# Altium PCB balan_31.PcbDoc (part 1 of 2)
Units mm, origin at the board's own origin, x right, y up, seen from the top; angles counter-clockwise.
Board outline 80 x 100 mm, 2 copper layers (Top Layer, Bottom Layer), stack 1.57 mm thick; 167 components, 120 nets, 563 pads, 148 vias.
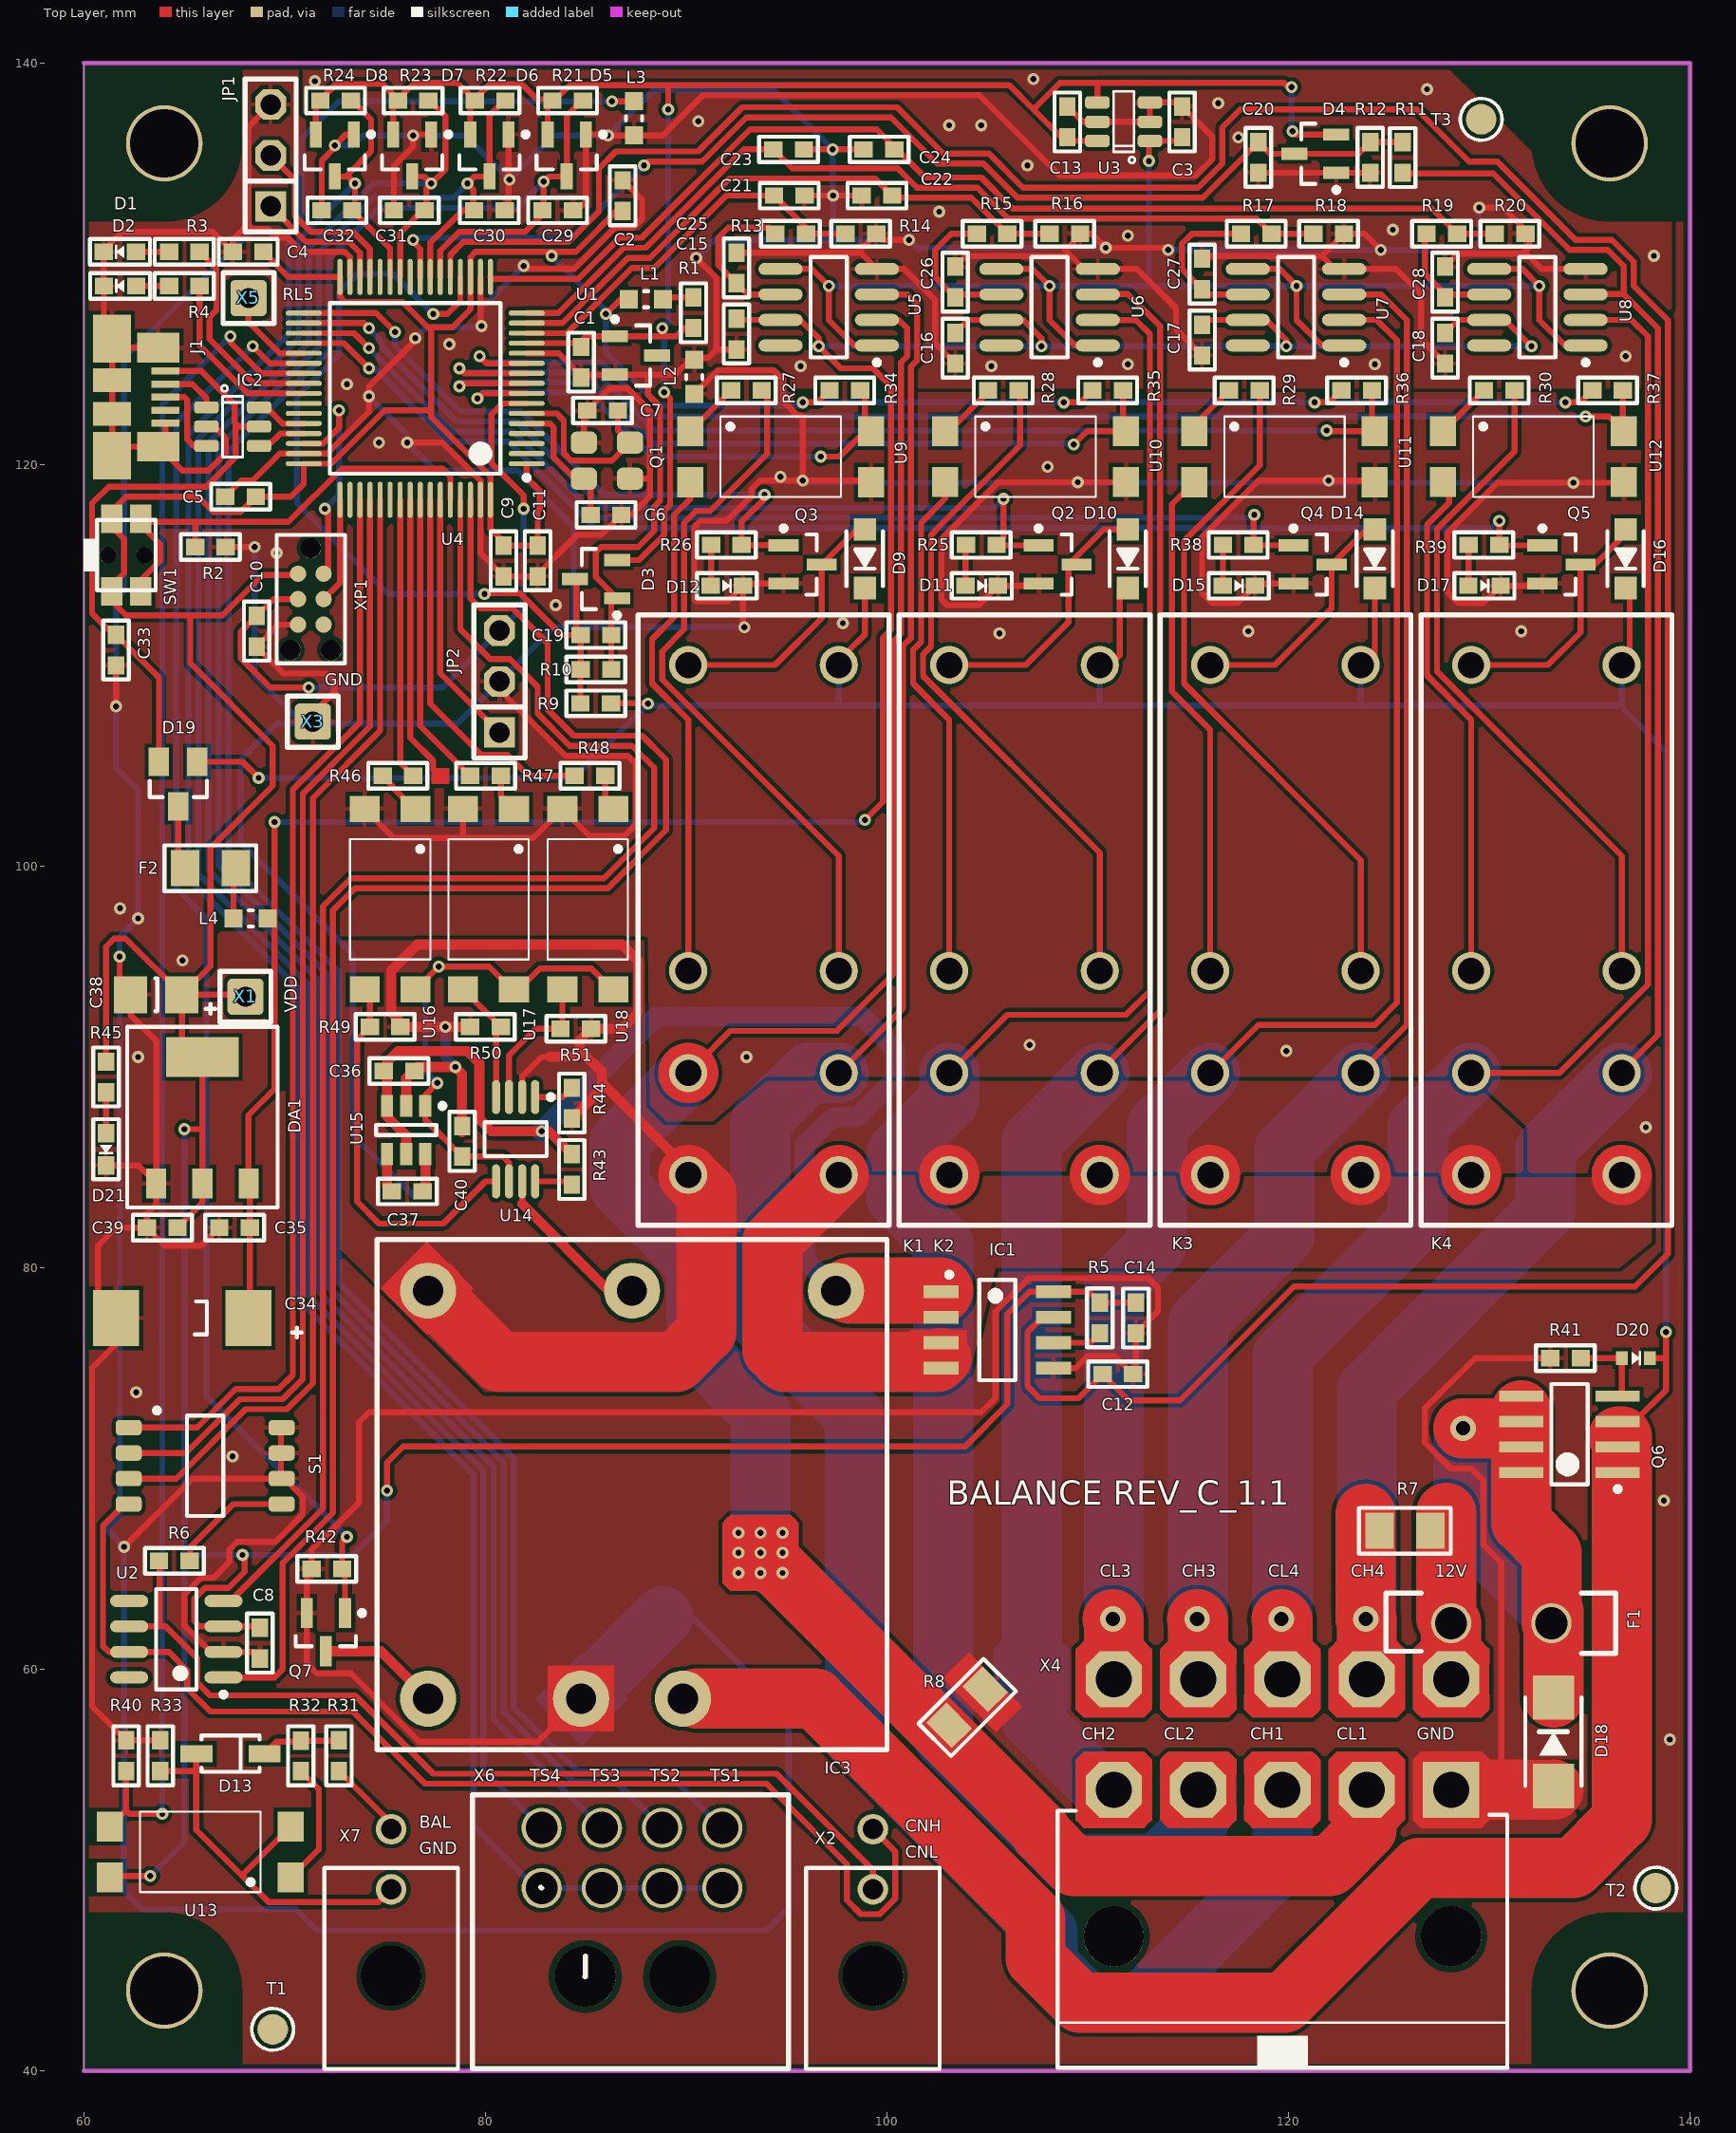
[diagram p0: Top Layer view]
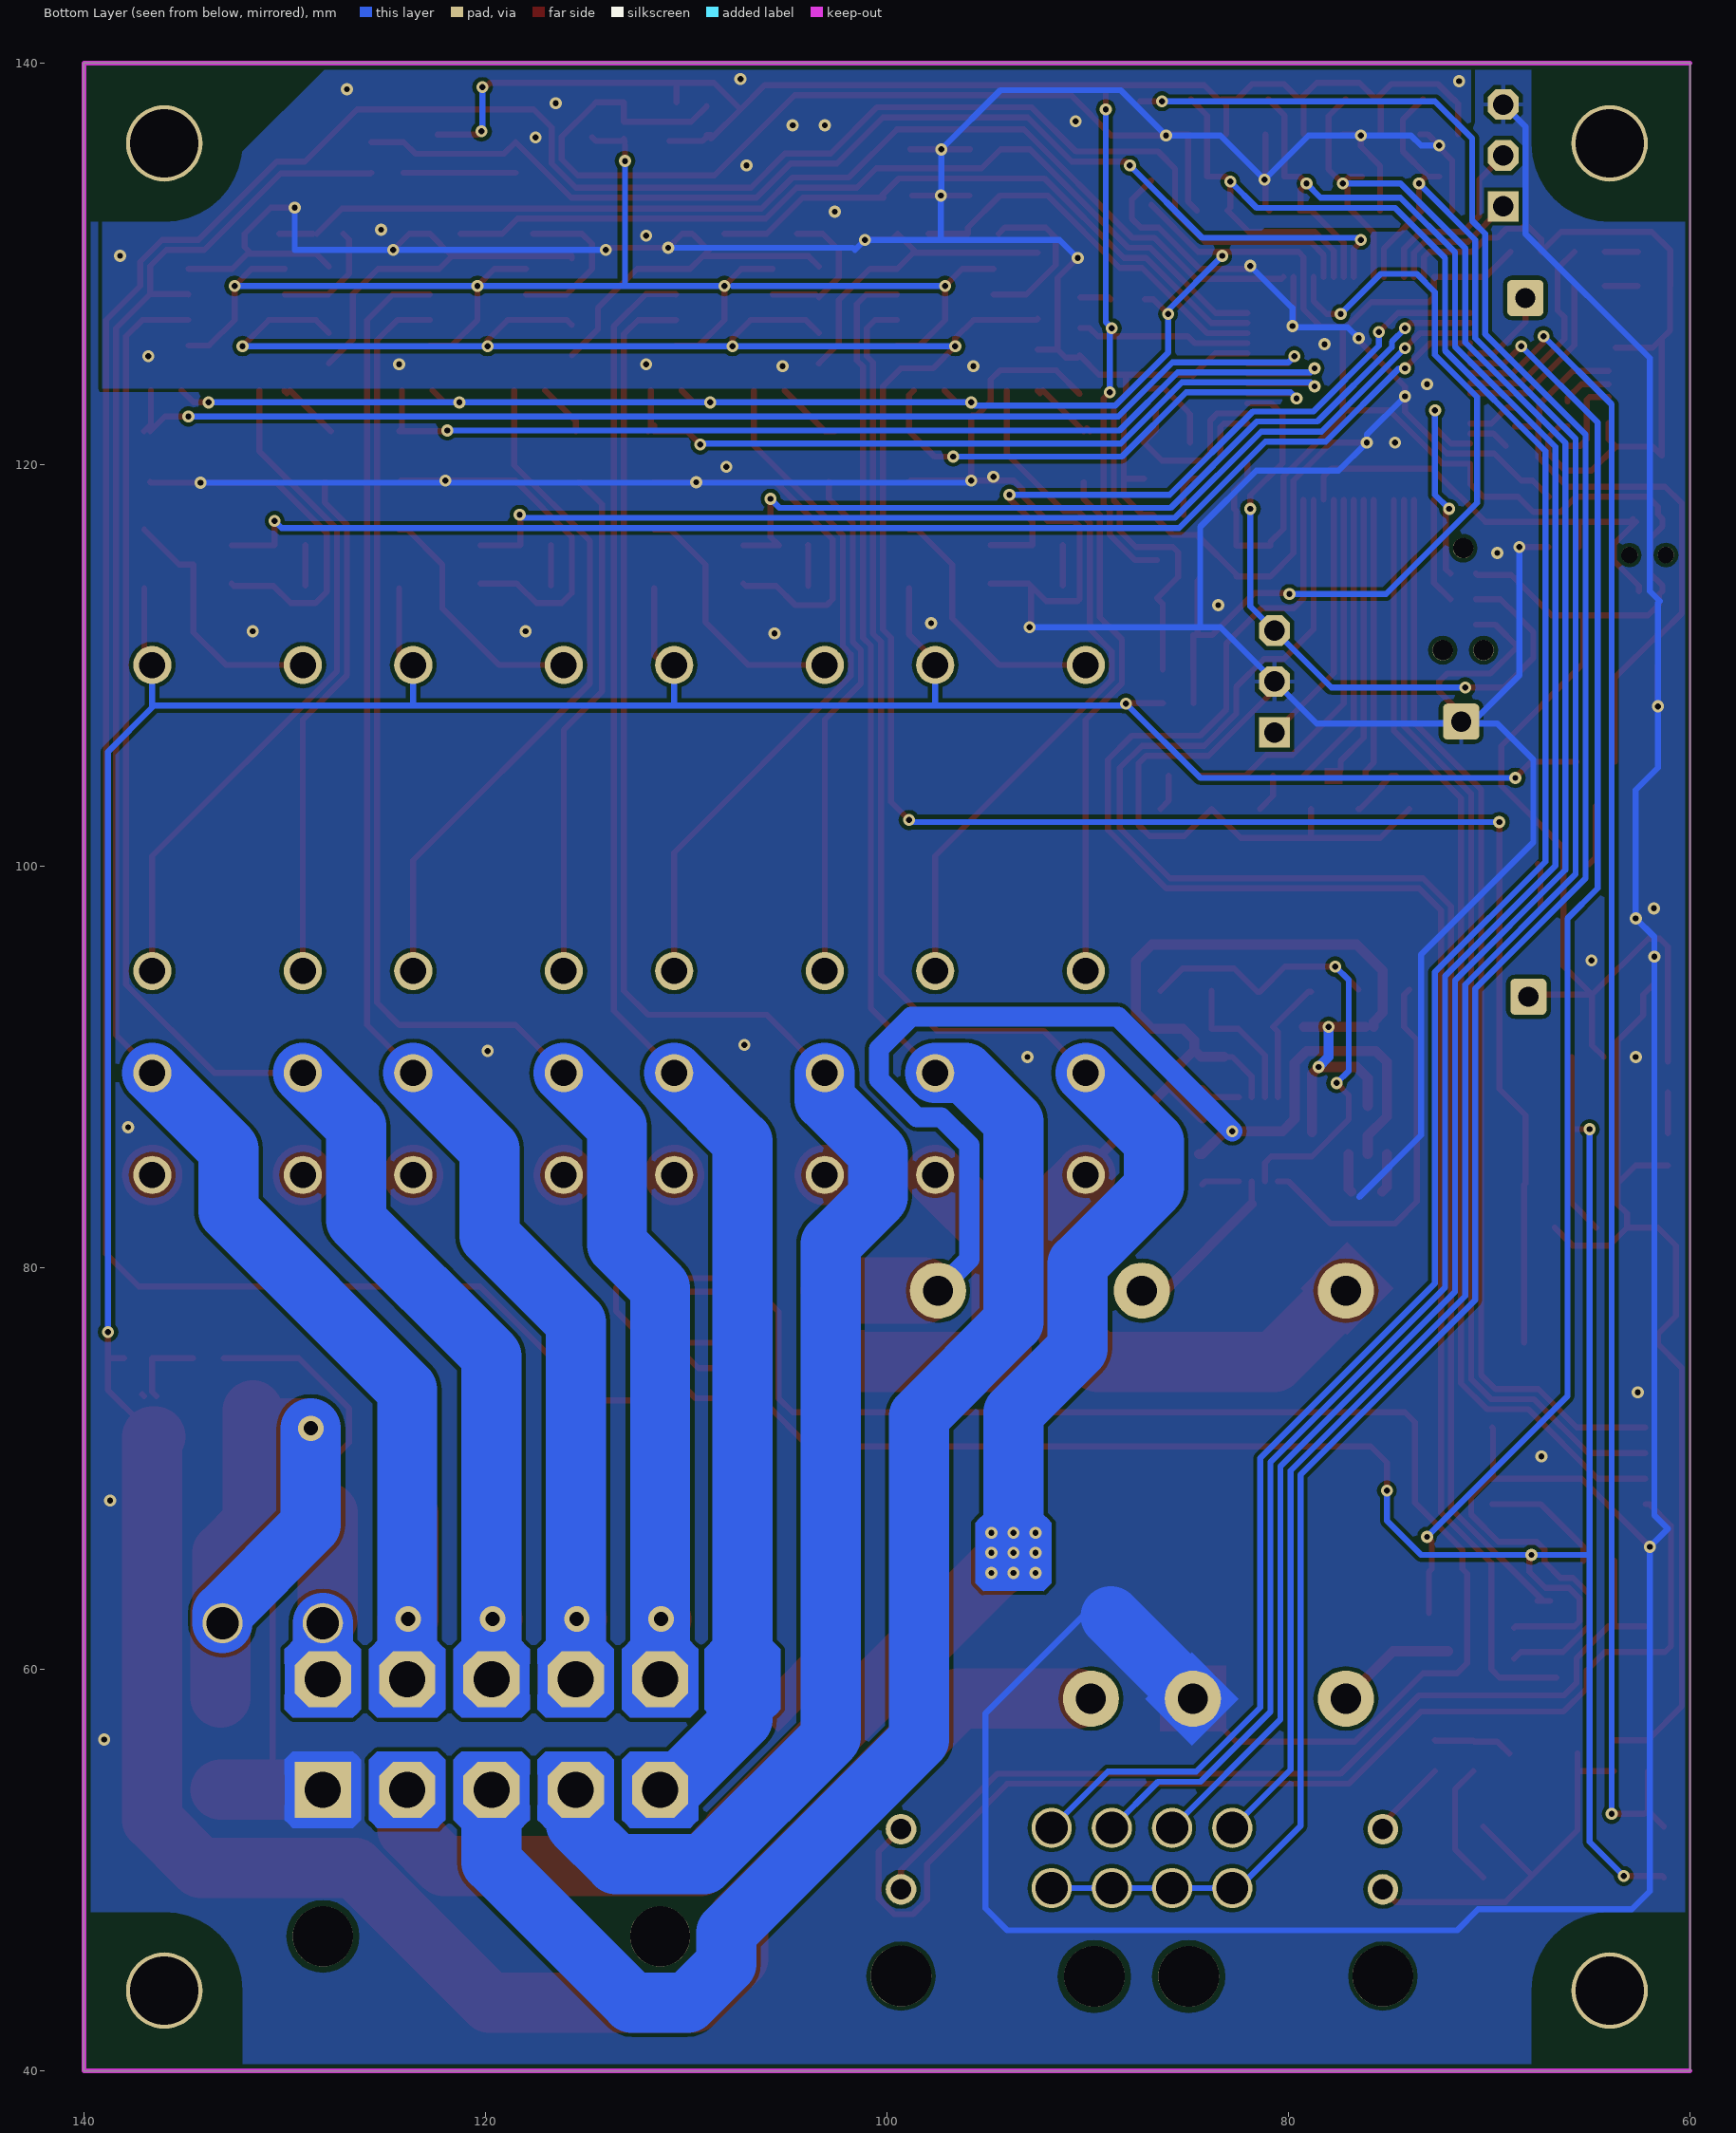
[diagram p1: Bottom Layer view, seen from below]

## Layer stack, top to bottom
Top Solder: solder mask 0.0102, Solder Resist, Dk 3.5
Top Layer: signal copper 0.035
Dielectric 1: dielectric 1.5, FR-4, Dk 4.8
Bottom Layer: signal copper 0.035
Bottom Solder: solder mask 0.0102, Solder Resist, Dk 3.5

## Board outline
60,40 140,40 140,140 60,140

## Design rules (kind name [scope] priority, off if disabled: settings)
Clearance "All to mounting hole" [IsPad and not PadIsPlated and Onlayer('Multi-Layer') And (HoleDiameter > 3.2)] p1: gap=2
Clearance "All to mounting hole_1" [IsPad and not PadIsPlated and Onlayer('Multi-Layer') And (HoleDiameter < 3.2)] p2: gap=0.3
Clearance Clearance_5 [All] p3: gap=0.2
Clearance Clearance_4 [(ObjectKind = 'Pad') And (Layer = 'MultiLayer') And (PadIsPlated = 'False')] p4: gap=0.3
Clearance Clearance_2 [(ObjectKind = 'Track') And (Layer = 'Top Layer') And (Net = 'USB_DP') vs InNamedPolygon('GND')] p5: gap=0.6
Clearance Clearance_3 [(ObjectKind = 'Track') And (Layer = 'Top Layer') And (Net = 'USB_DM') vs InNamedPolygon('GND')] p6: gap=0.6
Clearance Clearance_1 [(ObjectKind = 'Track') And (Layer = 'KeepOutLayer')] p7: gap=0.4
Clearance [All] p8: gap=0.2
ComponentClearance [All] p1: gap=0 collisioncheckmode=3 verticalgap=0 showdistances=FALSE
Height [All] p1: minheight=0 maxheight=40 prefheight=12.7
HoleSize [All] p1: absolutevalues=TRUE maxlimit=10 minlimit=0.3 maxpercent=80.000 minpercent=20.000
HoleToHoleClearance [All] p1: gap=0 allowstackedmicrovias=TRUE
MinimumSolderMaskSliver [All] p1: minsoldermaskwidth=0.15
PolygonConnect PolygonConnect_VIA [IsVia] p1: connectstyle=Direct reliefconductorwidth=0.254 reliefentries=4 polygonreliefangle="90 Angle" airgapwidth=0.254
PolygonConnect [All] p2: connectstyle=Relief reliefconductorwidth=0.22 reliefentries=4 polygonreliefangle="90 Angle" airgapwidth=0.2
RoutingVias [All] p1: holewidth=0.3 width=0.6 viastyle="Through Hole" minholewidth=0.3 minwidth=0.6 maxholewidth=10 maxwidth=20
SilkToSilkClearance [All] p1: silktosilkclearance=0
SilkToSolderMaskClearance [IsPad] p1: minsilkscreentomaskgap=0 clearancetoexposedcopper=TRUE
SolderMaskExpansion [All] p1: expansion=0.05
Width [All] p1: maxlimit=10 minlimit=0.125 preferedwidth=0.3
Width PWR [InNetClass('PWR')] p2: maxlimit=5 minlimit=0.3 preferedwidth=3
23 further rules are at their usual default settings.

## Classes and differential pairs
component class Rev_C_Mcu: C1 C2 C3 C4 C5 C6 C7 C8 C9 C10 C11 C12 C13 C14 C15 C16 C17 C18 C19 C20 C21 C22 C23 C24 C25 C26 C27 C28 C29 C30 C31 C32 D1 D2 D3 D4 D5 D6 D7 D8 D9 D10 D11 D12 D13 D14 D15 D16 D17 IC1 IC2 J1 JP1 JP2 JP? K1 K2 K3 K4 L1 L2 L3 Q1 Q2 Q3 Q4 Q5 R1 R2 R3 R4 R5 R6 R7 R8 R9 R10 R11 R12 R13 R14 R15 R16 R17 R18 R19 R20 R21 R22 R23 R24 R25 R26 R27 R28 R29 R30 R31 R32 R33 R34 R35 R36 R37 R38 R39 R40 S1 SW1 T1 T2 T3 U1 U2 U3 U4 U5 U6 U7 U8 U9 U10 U11 U12 U13 X1 X2 X3 X4 X5 X6 X7 XP1
component class Rev_C_Power: C33 C34 C35 C36 C37 C38 C39 C40 D18 D19 D20 D21 DA1 F1 F2 IC3 L4 Q6 Q7 R41 R42 R43 R44 R45 R46 R47 R48 R49 R50 R51 U14 U15 U16 U17 U18
net class PWR: GND GNDL V_BAT_12V VB1H VB2H VB2L VB3H VB3L VB4H VB4L

## Components (designator, comment, footprint, x,y, rotation, side; value= is the part's Value field where it differs from the comment)
C1 "100nF" C0603#1 84.763,125.1 r90 top
C2 "100nF" C0603#1 86.834,133.4 r270 top
C3 "270pF" C0603#1 114.7,137.075 r270 top
C4 "100nF" C0603#1 68.175,130.6 r0 top
C5 "100nF" C0603#1 67.8,118.4 r0 top
C6 "9 pf" C0603#1 86,117.5 r0 top
C7 "9 pf" C0603#1 85.838,122.7 r180 top
C8 "100nF" C0603#1 68.762,61.3 r90 top
C9 "100nF" C0603#1 80.9,115.2 r90 top
C10 "100nF" C0603#1 68.6,111.7 r90 top
C11 "100nF" C0603#1 82.6,115.2 r90 top
C12 "220nF" C0603#1 111.5,74.7 r180 top
C13 "100nF" C0603#1 108.983,137.075 r270 top
C14 "100nF" C0603#1 112.4,77.5 r270 top
C15 "220nF" C0603#1 92.5,126.5 r90 top
C16 "220nF" C0603#1 103.4,125.8 r90 top
C17 "220nF" C0603#1 115.7,126.2 r90 top
C18 "220nF" C0603#1 127.8,125.8 r90 top
C19 "220nF" C0603#1 85.5,111.513 r180 top
C20 "220nF" C0603#1 118.5,135.3 r90 top
C21 "220nF" C0603#1 95.138,133.4 r180 top
C22 "220nF" C0603#1 99.5,133.4 r0 top
C23 "220nF" C0603#1 95.1,135.7 r180 top
C24 "220nF" C0603#1 99.6,135.7 r0 top
C25 "220pF" C0603#1 92.5,129.8 r270 top
C26 "220pF" C0603#1 103.4,129.1 r270 top
C27 "220pF" C0603#1 115.7,129.5 r270 top
C28 "220pF" C0603#1 127.8,129.1 r270 top
C29 "220nF" C0603#1 83.6,132.663 r180 top
C30 "220nF" C0603#1 80.197,132.663 r180 top
C31 "220nF" C0603#1 76.2,132.663 r0 top
C32 "220nF" C0603#1 72.597,132.663 r0 top
C33 "100nF" C0603#1 61.6,110.762 r90 top
C34 "4.7 uF" "SMD D" 68.2,77.5 r180 top
C35 "100nF" C0603#1 67.5,82 r0 top
C36 "22uF" C0603#1 75.7,89.8 r180 top
C37 "1uF 25V" C0603#1 76.1,83.8 r0 top
C38 "10 uF" "SMD A" 63.6,93.6 r180 top
C39 "100nF" C0603#1 63.9,82 r0 top
C40 "22uF" C0603#1 78.838,86.3 r270 top
D1 "Red" CHIP-LED0603 61.8,130.6 r90 top
D2 "YELLOW" CHIP-LED0603 61.806,128.9 r90 top
D3 "BAT54S" SOT23_N 85.5,114.3 r180 top
D4 "BAT54S" SOT23_N 121.337,135.487 r180 top
D5 "BAT54S" SOT23_N 84.047,135.4 r270 top
D6 "BAT54S" SOT23_N 80.197,135.4 r270 top
D7 "BAT54S" SOT23_N 76.347,135.4 r270 top
D8 "BAT54S" SOT23_N 72.497,135.4 r270 top
D9 "Schotky" SOD123F 98.9,115.3 r90 top
D10 "Schotky" SOD123F 112,115.3 r90 top
D11 "Red" CHIP-LED0603 104.714,113.964 r270 top
D12 "Red" CHIP-LED0603 92.014,113.964 r270 top
D13 "5V1" 425 67.3,55.8 r180 top
D14 "Schotky" SOD123F 124.3,115.3 r90 top
D15 "Red" CHIP-LED0603 117.514,113.964 r270 top
D16 "Schotky" SOD123F 136.8,115.3 r90 top
D17 "Red" CHIP-LED0603 129.752,113.964 r270 top
D18 "TVS_diode" SMB_BIDIR 133.2,56.4 r270 top
D19 "BAT54C" SOT23 64.7,104.1 r180 top
D20 "Zener" SOD523 137.3,75.5 r180 top
D21 "GREEN" CHIP-LED0603 61.1,85.913 r180 top
DA1 "NCP1117ST33" SOT223 63.6,84.2 r0 top
F1 "PTC_Fuse" RUEF250 130.6,62.3 r0 top
F2 "Resettable fuse" R1206 66.3,99.9 r0 top
IC1 "ACS711" SO8-ACS 105.5,76.9 r0 top
IC2 "USBLC6-2" SOT23-6L 67.4,121.9 r270 top
IC3 "DC/DC" DCDC_1x1 87.3,68.7 r90 top
J1 "USB-Micro-47346" USB_micro_B 64.06,123.363 r0 top
JP1 "DFU" 1X03 69.3,135.4 r90 top
JP2 "DFU" 1X03 80.7,109.2 r90 top
K1 "Rele_RTE24012" Switch_RTE24024 93.85,97.32 r270 top
K2 "Rele_RTE24012" Switch_RTE24024 106.85,97.32 r270 top
K3 "Rele_RTE24012" Switch_RTE24024 119.85,97.32 r270 top
K4 "Rele_RTE24012" Switch_RTE24024 132.85,97.32 r270 top
L1 "10 uH" C0603#2 88,128.237 r180 top
L2 "10 uH" C0603#2 90.4,124.371 r270 top
L3 "10 uH" C0603#2 87.4,137.25 r90 top
L4 "10 uH" C0603#2 68.3,97.4 r0 top
Q1 "16 Mhz" KX-7 87.2,119.3 r180 top
Q2 "MOSFET-N" SOT23-3N 108.5,115.027 r0 top
Q3 "MOSFET-N" SOT23-3N 95.798,115.027 r0 top
Q4 "MOSFET-N" SOT23-3N 121.2,115.027 r0 top
Q5 "MOSFET-N" SOT23-3N 133.598,115.027 r0 top
Q6 "P-Channel" "SO-8 - IRF FET" 134,71.707 r180 top
Q7 "MOSFET-N" SOT23-3N 72.05,61.85 r270 top
R1 "110R" R0603 90.362,127.571 r270 top
R2 "10k" R0603 66.3,115.9 r180 top
R3 "2K" R0603 65,130.6 r180 top
R4 "2K" R0603 65,128.9 r180 top
R5 "2K" R0603 110.6,77.5 r90 top
R6 "120R" R0603 64.5,65.4 r0 top
R7 "0" R1206 125.8,66.9 r0 top
R8 "0" R1206 104,58.1 r225 top
R9 "4k99 0.1%" R0603 85.487,108.113 r0 top
R10 "1k 0.1%" R0603 85.5,109.8 r180 top
R11 "20k 0.1%" R0603 125.687,135.3 r270 top
R12 "1k 0.1%" R0603 124.074,135.3 r90 top
R13 "4k99 0.1%" R0603 95.2,131.5 r180 top
R14 "4k99 0.1%" R0603 98.7,131.5 r180 top
R15 "4k99 0.1%" R0603 105.238,131.5 r180 top
R16 "4k99 0.1%" R0603 108.862,131.5 r180 top
R17 "4k99 0.1%" R0603 118.4,131.5 r180 top
R18 "4k99 0.1%" R0603 122,131.5 r180 top
R19 "4k99 0.1%" R0603 127.638,131.5 r180 top
R20 "4k99 0.1%" R0603 131.038,131.5 r180 top
R21 "10k" R0603 84.097,138.137 r180 top
R22 "10k" R0603 80.235,138.137 r180 top
R23 "10k" R0603 76.397,138.137 r180 top
R24 "10k" R0603 72.535,138.137 r180 top
R25 "2K" R0603 104.7,116 r180 top
R26 "2K" R0603 92,116 r180 top
R27 "2K" R0603 93,123.7 r180 top
R28 "2K" R0603 105.8,123.7 r180 top
R29 "2K" R0603 117.8,123.7 r180 top
R30 "2K" R0603 130.5,123.7 r180 top
R31 "470R" R0603 72.7,55.7 r270 top
R32 "470R" R0603 70.8,55.687 r90 top
R33 "4k7" R0603 63.8,55.7 r270 top
R34 "4k7" R0603 97.9,123.7 r180 top
R35 "4k7" R0603 111,123.7 r180 top
R36 "4k7" R0603 123.4,123.7 r180 top
R37 "4k7" R0603 135.9,123.7 r180 top
R38 "2K" R0603 117.5,116 r180 top
R39 "2K" R0603 129.738,116 r180 top
R40 "4k7" R0603 62.1,55.7 r270 top
R41 "4k7" R0603 133.8,75.5 r180 top
R42 "10k" R0603 72.1,65 r180 top
R43 "100R" R0603 84.3,84.9 r270 top
R44 "100R" R0603 84.3,88.2 r90 top
R45 "2K" R0603 61.1,89.5 r90 top
R46 "2K" R0603 75.638,104.5 r180 top
R47 "2K" R0603 80,104.5 r0 top
R48 "2K" R0603 85.2,104.5 r0 top
R49 "4k7" R0603 75,92 r0 top
R50 "4k7" R0603 80,92 r180 top
R51 "4k7" R0603 84.5,91.9 r0 top
S1 "SW DIP-4_1.27" 218-4LPSTR 66.035,70.135 r0 top
SW1 "PTS840 GKP SMTR LFS" PTS840-P 62.1,115.5 r270 top
T1 "TPP-SMD-15R" SMD-15R 69.4,42.067 r90 top
T2 "TPP-SMD-15R" SMD-15R 138.3,49.1 r90 top
T3 "TPP-SMD-15R" SMD-15R 129.6,137.2 r90 top
U1 "LM4040AIM3-3.0" MF03A_N 87.5,125.437 r0 top
U2 "SN65HVD232D" D8_L 64.6,61.5 r180 top
U3 "MCP1501T-10E" SOT23-6L 111.8,137.075 r90 top
U4 "STM32F072RBT6" LQFP64_N 76.5,123.8 r180 top
U5 "AD629" ADI-R-8_N 97.1,127.841 r180 top
U6 "AD629" ADI-R-8_N 108.1,127.841 r180 top
U7 "AD629" ADI-R-8_N 120.375,127.841 r180 top
U8 "AD629" ADI-R-8_N 132.4,127.841 r180 top
U9 "Optron" LTV-816S 94.7,120.396 r270 top
U10 "Optron" LTV-816S 107.4,120.4 r270 top
U11 "Optron" LTV-816S 119.8,120.396 r270 top
U12 "Optron" LTV-816S 132.2,120.4 r270 top
U13 "Optron" LTV-816S 65.8,50.9 r90 top
U14 "MAX5402EUA" MAXM-U8-1_N 81.5,86.4 r270 top
U15 "LTC1754ES6-5" LT-S6-6-SOT-23_N 76.051,86.862 r270 top
U16 "Optron" LTV-816S 75.25,98.354 r180 top
U17 "Optron" LTV-816S 80.15,98.354 r180 top
U18 "Optron" LTV-816S 85.1,98.354 r180 top
X1 "VDD" "Pin Header 1x1 TH Pitch 2.54mm" 68.047,93.5 r0 top
X2 "Micro_Fit _2" 43045-020X 99.3,40.1 r0 top
X3 "GND" "Pin Header 1x1 TH Pitch 2.54mm" 71.4,107.2 r0 top
X4 "Mini-Fit 0039301101" "Mini-Fit 0039301101" 119.7,54 r0 top
X5 "RL5" "Pin Header 1x1 TH Pitch 2.54mm" 68.2,128.3 r0 top
X6 "Micro_Fit _8" Micro_Fit_8 87.3,52.1 r0 top
X7 "Micro_Fit _2" 43045-020X 75.3,40.1 r0 top
XP1 "Jtag" TC2030-IDC 71.3,113.3 r270 top

## Footprints (in the part's own frame and the unit in brackets; to place one, negate y for a bottom-side part, rotate by r counter-clockwise, add the part's x,y. Pads: shape width x height; smd on the part's side, far side on the other; paste and mask are expansions set on the pad)
1X03 [mil] "1X03"
  rect 60x60 hole 40: 1(-100,0)
  oct 60x60 hole 40: 2(0,0) 3(100,0)
  silkscreen extent -150,-50 150,50
218-4LPSTR [mm] "SOIC, 8-Leads, Body 4.9x3.9mm, Pitch 1.27mm, IPC Medium Density"
  rrect50% 1.3x0.76 smd: 1(-3.81,1.905) 2(-3.81,0.635) 3(-3.81,-0.635) 4(-3.81,-1.905) 5(3.81,-1.905) 6(3.81,-0.635) 7(3.81,0.635) 8(3.81,1.905)
  silkscreen extent -2.52,-2.5 0.9,2.88, body extent -2,-2.5 2,2.5, height 1.75
425 [mm] "SOD-123; 2 Leads; Body 2.7 x 1.6 mm, (LxW)"
  rect 1.6x0.85 smd: 1(-1.7,0) 2(1.7,0)
  silkscreen extent -1.45,-0.9 1.45,0.9
43045-020X [mil] "43045-020X"
  round 119 hole 119: 0(0,182)
  round 60 hole 40: 1(0,352) 2(0,470)
  silkscreen extent -131,0 131,394, body extent -141,2 141,484, height 348
ADI-R-8_N [mm] "SOIC, 8-Leads, Body 4.9x3.9mm, Pitch 1.27mm, IPC Medium Density"
  oval 2.2x0.6 smd: 1(-2.4,1.905) 2(-2.4,0.635) 3(-2.4,-0.635) 4(-2.4,-1.905) 5(2.4,-1.905) 6(2.4,-0.635) 7(2.4,0.635) 8(2.4,1.905)
  silkscreen extent -2.53,-2.5 0.9,2.88, body extent -2,-2.5 2,2.5, height 1.75
C0603#1 [mil] "C0603"
  rect 36x32 smd: 1(-30,0) 2(30,0)
  silkscreen extent -58,-25 58,25
C0603#2 [mil]
  rect 35.43x35.43 smd: 1(-33.46,0) 2(33.46,0)
  silkscreen extent -4,-16 4,16, body extent -31,-16 32,16, height 12
CHIP-LED0603 [mil] "CHIP-LED0603"
  rect 32x36 smd: A(0,-31.25) C(0,32)
  silkscreen extent -25,-59 25,59
D8_L [mm] "SOIC, 8-Leads, Body 4.9x3.9mm, Pitch 1.27mm, IPC High Density"
  oval 1.9x0.6 smd: 1(-2.35,1.905) 2(-2.35,0.635) 3(-2.35,-0.635) 4(-2.35,-1.905) 5(2.35,-1.905) 6(2.35,-0.635) 7(2.35,0.635) 8(2.35,1.905)
  silkscreen extent -2.48,-2.5 1,2.88, body extent -2,-2.5 2,2.5, height 1.75
DCDC_1x1 [mm]
  round 2.8 hole 1.5: 1(-10.16,-2.54) 2(-10.16,2.54) 3(-10.16,10.16) 4(10.16,-10.16) 5(10.16,0) 6(10.16,10.16)
  silkscreen extent -12.7,-12.7 12.7,12.7, body extent -12.7,-12.7 12.7,12.7, height 9.9
KX-7 [mm]
  rrect50% 1.3x1.1 smd: 1(0,-1.8) 2(2.3,-1.8) 3(2.3,0) 4(0,0)
LQFP64_N [mm] "Thin QFP, 64-Leads, Body 10x10mm, Pitch 0.5mm, IPC Medium Density"
  oval 1.8x0.25 smd: 1(-5.55,3.75) 2(-5.55,3.25) 3(-5.55,2.75) 4(-5.55,2.25) 5(-5.55,1.75) 6(-5.55,1.25) 7(-5.55,0.75) 8(-5.55,0.25) 9(-5.55,-0.25) 10(-5.55,-0.75) 11(-5.55,-1.25) 12(-5.55,-1.75) 13(-5.55,-2.25) 14(-5.55,-2.75) 15(-5.55,-3.25) 16(-5.55,-3.75) 33(5.55,-3.75) 34(5.55,-3.25) 35(5.55,-2.75) 36(5.55,-2.25) 37(5.55,-1.75) 38(5.55,-1.25) 39(5.55,-0.75) 40(5.55,-0.25) 41(5.55,0.25) 42(5.55,0.75) 43(5.55,1.25) 44(5.55,1.75) 45(5.55,2.25) 46(5.55,2.75) 47(5.55,3.25) 48(5.55,3.75)
  oval 0.25x1.8 smd: 17(-3.75,-5.55) 18(-3.25,-5.55) 19(-2.75,-5.55) 20(-2.25,-5.55) 21(-1.75,-5.55) 22(-1.25,-5.55) 23(-0.75,-5.55) 24(-0.25,-5.55) 25(0.25,-5.55) 26(0.75,-5.55) 27(1.25,-5.55) 28(1.75,-5.55) 29(2.25,-5.55) 30(2.75,-5.55) 31(3.25,-5.55) 32(3.75,-5.55) 49(3.75,5.55) 50(3.25,5.55) 51(2.75,5.55) 52(2.25,5.55) 53(1.75,5.55) 54(1.25,5.55) 55(0.75,5.55) 56(0.25,5.55) 57(-0.25,5.55) 58(-0.75,5.55) 59(-1.25,5.55) 60(-1.75,5.55) 61(-2.25,5.55) 62(-2.75,5.55) 63(-3.25,5.55) 64(-3.75,5.55)
  silkscreen extent -5.68,-4.25 4.25,4.57, body extent -5,-5 5,5, height 1.6
LT-S6-6-SOT-23_N [mm] "SOT23, 6-Leads, Body 3x1.75mm, Pitch 0.95mm, IPC Medium Density"
  rect 1.1x0.6 smd: 1(-1.2,0.95) 2(-1.2,0) 3(-1.2,-0.95) 4(1.2,-0.95) 5(1.2,0) 6(1.2,0.95)
  silkscreen extent -1.32,-1.5 0.25,1.93, body extent -0.87,-1.5 0.87,1.5, height 1.45
LTV-816S [mm]
  rect 1.5x1.3 smd: 1(-1.27,-4.5) 2(1.27,-4.5) 3(1.27,4.5) 4(-1.27,4.5)
  silkscreen extent -2,-3 2,3, body extent -2.3,-3.3 2.3,3.3, height 3.5
MAXM-U8-1_N [mm] "SOP, 8-Leads, Body 3x3mm, Pitch 0.65mm, IPC Medium Density"
  oval 1.7x0.4 smd: 1(-2.1,0.975) 2(-2.1,0.325) 3(-2.1,-0.325) 4(-2.1,-0.975) 5(2.1,-0.975) 6(2.1,-0.325) 7(2.1,0.325) 8(2.1,0.975)
  silkscreen extent -2.22,-1.55 0.85,1.88, body extent -1.55,-1.55 1.55,1.55, height 1.1
MF03A_N [mm] "SOT23, 3-Leads, Body 2.9x1.3mm, Pitch 0.95mm, Lead Span 2.4mm, IPC Medium Density"
  rect 1.3x0.6 smd: 1(-1.05,0.95) 2(-1.05,-0.95) 3(1.05,0)
  silkscreen extent -1.17,-1.5 0.7,1.92, body extent -0.7,-1.5 0.7,1.5, height 1.12
Micro_Fit_8 [mm]
  round 3.023 hole 3.023 unplated: 0(-2.33,-7.4) 0(2.37,-7.4)
  round 2 hole 1.6: 1(4.5,-3) 2(1.5,-3) 3(-1.5,-3) 4(-4.5,-3) 5(4.5,0) 6(1.5,0) 7(-1.5,0) 8(-4.5,0)
  silkscreen extent -7.95,-12 7.8,1.65, body extent -8.07,-11.85 8.08,0.39, height 8.83
"Mini-Fit 0039301101" [mm] "Mini-Fit 0039301101 2x5 Right"
  round 3 hole 3 unplated: 0(-8.4,-7.3) 0(8.4,-7.3)
  rect 2.8x2.8 hole 1.8: 1(8.4,0)
  oct 2.8x2.8 hole 1.8: 2(4.2,0) 3(0,0) 4(-4.2,0) 5(-8.4,0) 6(8.4,5.5) 7(4.2,5.5) 8(0,5.5) 9(-4.2,5.5) 10(-8.4,5.5)
  silkscreen extent -11.2,-13.84 11.22,-1.04, body extent -11.2,-13.9 11.4,6.04, height 11.4
"Pin Header 1x1 TH Pitch 2.54mm" [mm] "PinHeader 1x1 TH Pitch 2.54mm"
  rrect25% 1.8x1.8 hole 1: 1(0,0)
  silkscreen extent -1.27,-1.27 1.27,1.27, body extent -1.27,-1.27 1.27,1.27, height 9.5
PTS840-P [mil] "PTS840-P"
  round 32.01 hole 32.01: 0(0,36)
  round 32 hole 32: 0(0,-35.43)
  rect 56x42 smd: 1(-70.87,29) 2(71,29) 3(-70.87,-28.54) 4(71,-28.54)
  silkscreen extent -69,-83 69,58
R0603 [mil] "R0603"
  rect 36x32 smd: 1(-30,0) 2(30,0)
  silkscreen extent -58,-25 58,25
R1206 [mil] "R1206"
  rect 56x71 smd: 1(-50,0) 2(50,0)
  silkscreen extent -90,-45 90,45
RUEF250 [mm]
  round 2 hole 1.6: 1(-2.5,0) 2(2.5,0)
  silkscreen extent -5.75,-1.5 5.7,1.5, body extent -5.7,-0.6 5.7,0.6, height 29
SMB_BIDIR [mil] "SMB_BIDIR"
  rect 87x81 smd: 1(-86.61,0) 2(87,0)
  silkscreen extent -87,-55 87,55
"SMD A" [mm]
  rect 1.65x1.85 smd: 1(-1.275,0) 2(1.275,0)
  silkscreen extent -2.95,-0.82 0.05,0.95, body extent -1.6,-0.8 1.6,0.8, height 1.8
"SMD D" [mil]
  rect 90x110 smd: 1(0,0) 2(260,0)
  silkscreen extent -104,-32 105,38, body extent -22,-81 266,89, height 122
SMD-15R [mil] "SMD-15R"
  rrect100% 60x60 smd: TP(0,0)
  silkscreen extent -41,-41 41,41
SO8-ACS [mm] "SOIC, 8-Leads, Body 4.9x3.9mm, Pitch 1.27mm, IPC Medium Density"
  rect 1.75x0.65 smd: 1(-2.8,1.905) 2(-2.8,0.635) 3(-2.8,-0.635) 4(-2.8,-1.905) 5(2.8,-1.905) 6(2.8,-0.635) 7(2.8,0.635) 8(2.8,1.905)
  silkscreen extent -2.52,-2.5 0.9,2.88, body extent -2,-2.5 2,2.5, height 1.75
"SO-8 - IRF FET" [mm]
  rect 2.2x0.55 smd: 1(-2.4,1.905) 1(-2.4,-0.635) 1(-2.4,0.635) 2(-2.4,-1.905) 3(2.4,1.905) 3(2.4,-0.635) 3(2.4,0.635) 3(2.4,-1.905)
  silkscreen extent -2.53,-2.5 0.9,2.85, body extent -2,-2.55 2,2.45, height 1.8
SOD123F [mil] "SOD123F"
  rect 44x44 smd: A(58,0) C(-57.09,0)
  silkscreen extent -53,-35 54,36
SOD523 [mm] "SOD323"
  rect 0.6x0.7 smd: A(0.7,0) C(-0.7,0)
  silkscreen extent -0.2,-0.3 0.2,0.3
SOT23 [mil] "SOT23"
  rect 40x56 smd: 1(-37.4,-43.31) 2(38,-43.31) 3(0,44)
  silkscreen extent -56,-6 56,26
SOT23-3N [mm] "SOT23, 3-Leads, Body 2.9x1.3mm, Pitch 0.95mm, Lead Span 2.5mm, IPC Medium Density"
  rect 1.5x0.6 smd: 1(-0.95,0.95) 2(-0.95,-0.95) 3(0.95,0)
  silkscreen extent -1.07,-1.5 0.7,1.92, body extent -1.32,-1.5 1.32,1.5, height 1.08
SOT23-6L [mil] "SOT23-6L"
  rrect50% 24x48 smd: 1(-37.4,-51.18) 2(0,-51.18) 3(38,-51.18) 4(38,52) 5(0,52) 6(-37.4,52)
  silkscreen extent -81,-22 60,20
SOT23_N [mm] "SOT23, 3-Leads, Body 2.9x1.3mm, Pitch 0.95mm, Lead Span 2.3mm, IPC Medium Density"
  rect 1.3x0.6 smd: 1(-1.05,0.95) 2(-1.05,-0.95) 3(1.05,0)
  silkscreen extent -1.18,-1.5 0.7,1.92, body extent -0.7,-1.5 0.7,1.5, height 1.1
SOT223 [mm]
  rect 1x1.5 smd mask-25.4: 1(0,0) 2(2.3,0) 3(4.6,0)
  rect 3.6x2 smd mask-25.4: 4(2.3,6.3)
  silkscreen extent -1.45,-1.2 6.05,7.8
Switch_RTE24024 [mm]
  round 1.9 hole 1.3: 11(7.62,3.75) 12(2.54,3.75) 14(12.7,3.75) 21(7.62,-3.75) 22(2.54,-3.75) 24(12.7,-3.75) A1(-12.7,3.75) A2(-12.7,-3.75)
  silkscreen extent -15.2,-6.25 15.2,6.25, body extent -15.2,-6.25 15.2,6.25, height 16.5
TC2030-IDC [mil] "TC2030-IDC"
  round 40 hole 40: 0(-100,0) 0(100,40) 0(100,-40)
  rrect100% 32x32 smd: 1(-50,-25) 2(-50,25) 3(0,-25) 4(0,25) 5(50,-25) 6(50,25)
  silkscreen extent -126,-67 126,67
USB_micro_B [mm] "Micro-USB OTG B type Molex 47346"
  rect 1.38x0.35 smd: 1(0,1.3) 2(0,0.65) 3(0,0) 4(0,-0.65) 5(0,-1.3)
  rect 1.9x2.375 smd: SHIELD(-2.66,-2.912) SHIELD(-2.66,2.912)
  rect 1.9x1.175 smd: SHIELD(-2.66,-0.837) SHIELD(-2.66,0.838)
  rect 2.1x1.475 smd: SHIELD(-0.36,-2.462) SHIELD(-0.36,2.462)
  body extent -4.8,-3.99 0.62,3.99, height 2.71

## Part data
C1 C2 C4 C5 C8 C9 C10 C11 C13 C14 C33 C35 C39: library part C_0603, "GRM188R71E104KA01J"
C3: library part C_0603, "CC0603KRX7R9BB271"
C6 C7: library part C_0603, "GRM1885C1H9R0DA01D"
C12 C15 C16 C17 C18 C19 C20 C21 C22 C23 C24 C29 C30 C31 C32: library part C_0603, "TMK107B7224KA-T"
C25 C26 C27 C28: library part C_0603, "CC0603KRX7R9BB221"
C34: library part "Cap Pol2", "293D475X9050D2WE3"
C36 C40: library part C_0603, "ZRB18AR61A226ME01L"
C37: library part C_0603, "885012106022"
C38: library part "Cap Pol2", "THJA106K010AJN"
D1 D11 D12 D15 D17: library part LEDCHIP-LED0603_2, "150060RS75000"
D2: library part LEDCHIP-LED0603_2, "150060YS75000"
D3 D4 D5 D6 D7 D8: library part BAT54S_1, "TBAT54S,LM"
D9 D10 D14 D16: library part SCHOTTKYSOD-123, "PMEG4010ETR,115"
D13: library part SCHOTTKY-1, "MMSZ4689-E3-08"
D18: library part DIODE-TVS-SMAJ_1, "SMAJ17CA"
D19: "BAT54C-G"
D20: library part SCHOTTKY-DIODESMA_2, "BZT52C10T-7"
D21: library part LEDCHIP-LED0603_2, "150060VS75000"
DA1: "NCP1117LPST33T3G"
F1: library part RUEF250, "RUEF250"
F2: library part 3216CP-3A_1, "0ZCJ0050AF2E"
IC1: "ACS711ELCTR-12AB-T"
IC2: "USBLC6-2SC6"
IC3: library part "DCDC_TDK_30_Single Output", "PDQ30-Q24-S3-D"
J1: "47346-0001"
JP1 JP2: library part PINHD-1X3, "DNP"
K1 K2 K3 K4: "RTE24012"
L1 L2 L3 L4: library part L2, "KLZ1608MHR100WTD25"
Q1: library part XTAL_4-pin_grounded, "TSX-3225 16.0000MF18X-AC3"
Q2 Q3 Q4 Q5: "NTR4003NT3G"
Q6: library part PMOS-2, "FDS6681Z"
Q7: "NTR4170NT1G"
R1: library part R_0603_18, "RC0603FR-07110RL"
R2 R21 R22 R23 R24 R42: library part R_0603_18, "RC0603FR-0710KL"
R3 R4 R5 R25 R26 R27 R28 R29 R30 R38 R39 R45 R46 R47 R48: library part R_0603_18, "RC0603FR-072KL"
R6: library part R_0603_18, "RC0603FR-07120RL"
R7 R8: library part R_0603_18, "DNP"
R9 R13 R14 R15 R16 R17 R18 R19 R20: library part R_0603_18, "ERA-3AEB4991V"
R10 R12: library part R_0603_18, "ERA-3AEB102V"
R11: library part R_0603_18, "ERA-3AEB203V"
R31 R32: library part R_0603_18, "RC0603FR-07470RL"
R33 R34 R35 R36 R37 R40 R41 R49 R50 R51: library part R_0603_18, "RC0603FR-074K7L"
R43 R44: library part R_0603_18, "RC0603FR-07100RL"
S1: "218-4LPSTR"
SW1: library part PB_NOPTS840
T1 T2 T3: "DNP"
U3: "MCP1501T-10E/CHY"
U5 U6 U7 U8: "AD629ARZ"
U9 U10 U11 U12 U13 U16 U17 U18: library part Optoisolator1, "LTV-816S"
U14: "MAX5402EUA+"
X1 X3 X5: library part "Test Point", "DNP"
X2 X7: library part 2PIN43045-020X, "0430450200"
X4: "0039301101"
X6: library part Micro_Fit_8, "0430450800"
XP1: library part TC2030-CTX-NL, "TC2030-CTX-NL"

## Free pads (board coordinates)
  round 3.8 hole 3.4 unplated: 0(64,44) 0(64,136) 0(136,44) 0(136,136)

## Via types
v1: diameter 0.6, hole 0.3, Top Layer to Bottom Layer, 143 vias
v2: diameter 1.27, hole 0.711, Top Layer to Bottom Layer, 5 vias

## Nets (pads, with @x,y where several pads share a name; then routed paths per layer and width w, separated by ;. In a path a pad name is that pad's centre, name@x,y a point inside that pad or via, vN(x,y) a via of type N, cw(c..) or ccw(c..) an arc to the next point about the centre after c; other vN are vias at no path point)
+3.3: C2.2 C4.2 C5.2 C8.2 C9.2 C11.2 C14.1 C38.1 C39.2 DA1.2 DA1.4 IC1.8 L1.2 R5.2 R34.2 R35.2 R36.2 R37.2 R45.2 SW1.3 SW1.4 U2.3 U4.1 U4.19 U4.32 U4.48 U4.64 U13.4 X1.1 XP1.1 | length 296
  Top Layer w0.3: R45.2@61.1,90.262 61.1,96 61.5,96.4 62.075,96.4 C38.1@64.875,93.6 ; U13.4@61.3,49.63 61.37,49.7 v1(63.3,49.7) ; DA1.4@64.3,90.5 64.875,91.075 C38.1@64.875,93.6 ; C39.2@64.662,82 65.9,83.238 DA1.2@65.9,84.2 65.9,86.9 ; v1(65,86.9) 65.9,86.9 ; DA1.4@65.9,90.5 65.9,86.9 ; v1(67.9,65.7) 68,65.7 68,64.855 67.2,64.055 66.031,64.055 65.5,63.524 65.5,62.4 65.765,62.135 U2.3@66.95,62.135 68.689,62.135 C8.2@68.762,62.062 ; X1.1@68.047,93.5 67.947,93.6 C38.1@64.875,93.6 ; C4.2@68.937,130.6 70.187,129.35 U4.32@72.75,129.35 72.75,128.35 73,128.1 75.881,128.1 77.131,126.85 ; XP1.1@70.665,114.57 70.595,114.5 68.9,114.5 66.9,112.5 65.3,112.5 ; v1(75.1,68.9) 75.1,70.3 75.9,71.1 103.9,71.1 106,73.2 106,77.7 107.105,78.805 IC1.8@108.3,78.805 110.057,78.805 R5.2@110.6,78.262 C14.1@112.4,78.262 ; U4.1@82.05,120.05 82.05,119.35 82.7,118.699 82.7,117.8 82.6,117.7 C11.2@82.6,115.962 C9.2@80.9,115.962 80.9,116.15 80.25,116.8 U4.64@80.25,118.25 80.25,119.414 77.295,122.369 77.295,122.533 77.3,122.538 ; v1@83.3,130.4 v1@83.5,130.6 ; v1(86,127.5) 86.737,128.237 L1.2@87.15,128.237 ; C2.2@86.834,132.938 84.496,130.6 v1@83.5,130.6 ; v1(95.8,123.1) 96.538,123.1 R34.2@97.138,123.7 ; v1(108.8,123.1) 109.638,123.1 R35.2@110.238,123.7 ; v1(121.3,123.1) 122.038,123.1 R36.2@122.638,123.7 ; v1(133.8,123.1) 134.538,123.1 R37.2@135.138,123.7 ; C38.1@64.875,93.6 66.3,95.025 66.3,100.9 69.4,104 69.4,106 65.3,110.1 65.3,112.5 ; 65.3,112.5 62.089,112.5 61.544,113.044 61.544,113.527 SW1.4@61.375,113.697 61.375,113.975 62,114.6 62,116.3 61.375,116.925 SW1.3@61.375,117.3 61.6,117.525 61.6,117.9 62.1,118.4 65.679,118.4 66.436,117.644 67.806,117.644 C5.2@68.562,118.4 70.3,118.4 70.95,119.05 U4.48@70.95,120.05 72.321,120.05 74.971,122.7 77.138,122.7 77.3,122.538 ; 77.131,126.85 78.35,126.85 79.25,127.75 U4.19@79.25,129.35 79.25,130.35 79.5,130.6 v1@83.5,130.6 ; 77.131,126.85 77.3,126.681 77.3,122.538
  Bottom Layer w0.3: v1(63.3,49.7) 65,51.4 65,65.7 ; v1(65,86.9) 65,65.7 ; v1(75.1,68.9) 75.1,67.4 73.4,65.7 v1(67.9,65.7) 65,65.7 ; v1(83.3,130.4) 86,127.7 v1(86,127.5) 86,125.581 88.631,122.95 95.65,122.95 v1(95.8,123.1) v1(108.8,123.1) v1(121.3,123.1) v1(133.8,123.1)
+5V: C33.2 D19.2 IC2.5 J1.1 | length 30.4
  Top Layer w0.3: D19.2@63.735,105.2 63.735,109.389 C33.2@61.6,111.524 61.476,111.524 60.4,112.6 60.4,118.065 61.235,118.9 66.1,118.9 67.56,120.36 67.56,122.04 ; J1.1@64.06,124.663 65.837,124.663 67.5,123 67.5,122.1 67.56,122.04 ; IC2.5@68.721,121.9 67.7,121.9 67.56,122.04
+11V: C15.2 C16.2 C17.2 C18.2 C34.1 C35.2 DA1.3 L4.2 U5.7 U6.7 U7.7 U8.7 | length 138.4
  Top Layer w0.3: C34.1@68.262,76.262 C35.2@68.262,82 68.262,84.138 DA1.3@68.2,84.2 68.2,87.6 69.5,88.9 v1(69.5,102.2) ; C15.2@92.5,127.262 92.556,127.206 U5.7@94.7,127.206 95.694,127.206 96.6,126.3 v1(96.6,125.9) 97.7,124.8 99.3,124.8 100.2,123.9 100.2,111.787 99.8,111.387 99.8,103.2 v1(98.9,102.3) ; C16.2@103.4,126.562 104.044,127.206 U6.7@105.7,127.206 106.794,127.206 107.7,126.3 v1(107.7,125.9) ; C17.2@115.7,126.962 115.944,127.206 U7.7@117.975,127.206 118.894,127.206 119.9,126.2 v1(119.9,125.9) ; C18.2@127.8,126.562 128.444,127.206 U8.7@130,127.206 130.794,127.206 v1(132.1,125.9)
  Bottom Layer w0.3: v1(69.5,102.2) 98.8,102.2 v1(98.9,102.3) ; v1(96.6,125.9) v1(107.7,125.9) v1(119.9,125.9) v1(132.1,125.9)
+12V: D9.C D10.C D14.C D16.C D19.1 D20.C IC3.1 K1.A1 K2.A1 K3.A1 K4.A1 Q6.1 R9.2 | length 213.4
  Top Layer w0.3: D19.1@65.65,105.2 67.9,105.2 v1(68.7,104.4) ; R9.2@86.249,108.113 88.087,108.113 v1(88.1,108.1) ; K1.A1@98.1,110.02 98.1,110.737 98.9,111.537 D9.C@98.9,113.85 ; K2.A1@111.1,110.02 111.6,110.52 D10.C@111.6,113.85 ; K3.A1@124.1,110.02 124.3,110.22 D14.C@124.3,113.85 ; D16.C@137,113.85 137,110.12 K4.A1@137.1,110.02 ; Q6.1@137.2,72.3 138.8,73.9 v1(138.8,76.8) ; D20.C@138,75.5 138.7,75.5
  Top Layer w3: IC3.1@90.54,58.54 96.435,58.54 104.5,50.475 104.5,50.47 107.4,47.57 107.4,45.6 109.6,43.4 119.8,43.4 126.5,50.1 134.2,50.1 136.6,52.5 136.6,71.587 136.45,71.587
  Bottom Layer w0.3: v1(68.7,104.4) 84.4,104.4 v1(88.1,108.1) 88.2,108 136.6,108 ; 97.6,108.1 K1.A1@97.6,110.02 ; 110.6,108.2 K2.A1@110.6,110.02 ; K2.A1@110.61,110.01 K2.A1@111.1,110.5 ; 123.6,108.2 K3.A1@123.6,110.02 ; K4.A1@136.6,110.02 136.6,108 ; v1(138.8,76.8) 138.8,105.7 136.6,107.9 136.6,108
ADC0: C21.2 R13.1 R14.2 U4.14 | length 19.7
  Top Layer w0.3: U4.14@82.05,126.55 84.05,126.55 87.3,129.8 88.4,129.8 92,133.4 C21.2@94.376,133.4 95.962,131.814 R13.1@95.962,131.5 R14.2@97.938,131.5
ADC1: C22.2 R15.1 R16.2 U4.15 | length 30.2
  Top Layer w0.3: U4.15@82.05,127.05 83.843,127.05 87.093,130.3 88.193,130.3 92.149,134.256 99.406,134.256 C22.2@100.262,133.4 ; C22.2@100.162,133.3 104.2,133.3 R15.1@106,131.5 R16.2@108.1,131.5
ADC2: C23.2 R17.1 R18.2 U4.16 | length 44.3
  Top Layer w0.3: U4.16@82.05,127.55 83.636,127.55 86.886,130.8 87.986,130.8 92.886,135.7 C23.2@94.338,135.7 95.282,134.756 100.536,134.756 101.493,133.8 104.5,133.8 106.044,132.256 118.406,132.256 R17.1@119.162,131.5 R18.2@121.238,131.5
ADC3: C24.2 R19.1 R20.2 U4.17 | length 55.6
  Top Layer w0.3: U4.17@80.25,129.35 80.35,129.25 84.628,129.25 86.679,131.3 87.779,131.3 93.179,136.7 99.5,136.7 101.9,134.3 104.707,134.3 106.251,132.756 127.144,132.756 R19.1@128.4,131.5 ; 81.631,129.25 82.169,129.25 ; R19.1@128.6,131.5 R20.2@130.276,131.5
ADC_PWR: C19.2 D3.3 R9.1 R10.2 U4.20 | length 43
  Top Layer w0.3: v1(77.4,127.5) 78.099,127.5 78.75,128.15 U4.20@78.75,129.35 ; v1(79.95,113.55) 80,113.6 81.7,113.6 83.787,111.513 84.525,111.513 84.525,114.225 D3.3@84.45,114.3 ; R9.1@84.725,108.113 84.725,109.787 R10.2@84.738,109.8 C19.2@84.738,111.513
  Bottom Layer w0.3: v1(77.4,127.5) 75.4,129.5 73.6,129.5 72.7,128.6 72.7,125.464 70.6,123.364 70.6,118.1 75.15,113.55 v1(79.95,113.55)
ADC_VB4H: C20.2 D4.3 R11.1 R12.2 U4.24 | length 57.1
  Top Layer w0.3: v1(76.4,131.2) 76.4,131.1 76.75,130.75 U4.24@76.75,129.35 ; v1(87.9,134.9) 88.1,135.1 90.8,135.1 92.993,137.293 100.207,137.293 102.5,135 104.8,135 106.5,133.3 115.738,133.3 C20.2@118.5,136.062 119.075,135.487 D4.3@120.287,135.487 123.499,135.487 R12.2@124.074,136.062 R11.1@125.687,136.062
  Bottom Layer w0.3: v1(76.4,131.2) 76.5,131.3 84.3,131.3 v1(87.9,134.9)
ADR1: S1.1 U4.51 | length 54.2
  Top Layer w0.3: S1.1@62.225,72.04 65.64,72.04 67.553,73.953 69.695,73.953 70.4,74.658 70.4,103.814 73.75,107.164 U4.51@73.75,118.25
ADR2: S1.2 U4.52 | length 55.4
  Top Layer w0.3: S1.2@62.225,70.77 65.077,70.77 67.76,73.453 69.902,73.453 70.9,74.451 70.9,103.607 74.25,106.957 U4.52@74.25,118.25
ADR3: S1.3 U4.53 | length 56.5
  Top Layer w0.3: S1.3@62.225,69.5 64.6,69.5 68.053,72.953 70.109,72.953 71.4,74.244 71.4,103.4 74.75,106.75 U4.53@74.75,118.25
B_USER: JP2.1 U4.59 | length 12.8
  Top Layer w0.3: U4.59@77.75,118.25 77.75,109.61 JP2.1@80.7,106.66
BALANCER: R40.2 U4.39 U13.3 | length 84.6
  Top Layer w0.3: U13.3@61.3,52.17 62.1,52.97 ; R40.2@62.1,54.938 62.1,52.97 ; v1(63.9,52.8) 62.27,52.8 62.1,52.97 ; v1(67.3,126.4) 67.3,126.081 68.831,124.55 U4.39@70.95,124.55
  Bottom Layer w0.3: v1(63.9,52.8) 63.9,123 v1(67.3,126.4)
BOOT: R2.2 SW1.1 SW1.2 U4.60 | length 23.6
  Top Layer w0.3: SW1.2@62.537,113.697 62.537,113.952 63.8,115.216 63.8,116.037 SW1.1@62.687,117.15 ; SW1.1@62.837,117.3 62.993,117.144 65.6,117.144 ; R2.2@65.538,115.9 65.538,117.082 65.6,117.144 ; U4.60@78.25,118.25 78.25,119.424 77.874,119.8 72.843,119.8 70.186,117.144 65.6,117.144
CANH: S1.4 U2.7 X2.2 | length 58.5
  Top Layer w0.3: S1.4@62.225,68.23 62.03,68.23 60.95,67.15 60.95,61.15 61.235,60.865 U2.7@62.25,60.865 64.235,60.865 65.15,59.95 65.15,59.05 66.3,57.9 73.4,57.9 77,54.3 94,54.3 98,50.3 98,48.5 98.7,47.8 99.632,47.8 100.412,48.58 100.412,50.926 X2.2@99.3,52.038
CANL: R6.1 U2.6 X2.1 | length 47
  Top Layer w0.3: U2.6@62.25,62.135 63.765,62.135 ; R6.1@63.765,65.4 63.765,62.135 ; X2.1@99.3,49.041 99.3,50 94.5,54.8 77.4,54.8 73.5,58.7 66.276,58.7 65.65,59.326 65.65,60.55 64.065,62.135 63.765,62.135
CANRX: U2.4 U4.61 | length 78
  Top Layer w0.3: U2.4@66.95,63.405 U2.4@67.305,63.405 ; U2.4@67.605,63.405 U2.4@67.305,63.405 ; U4.61@78.75,118.25 78.75,111.8 80.238,110.312 81.226,110.312 82.6,108.938 82.6,107.593 84.193,106 87.3,106 88.4,104.9 88.4,101.907 85.893,99.4 73.293,99.4 71.9,98.007 71.9,68 U2.4@67.305,63.405
CANTX: U2.1 U4.62 | length 83.9
  Top Layer w0.3: U2.1@66.65,59.595 U2.1@66.95,59.595 69.495,59.595 69.9,60 69.9,65.293 72.4,67.793 72.4,97.8 73.5,98.9 86.1,98.9 89,101.8 89,105.3 87.8,106.5 84.4,106.5 83.1,107.8 83.1,111.1 81.348,112.852 79.729,112.852 79.25,113.331 U4.62@79.25,118.25
CUR: C12.2 IC1.7 U4.21 | length 162.5
  Top Layer w0.3: U4.21@78.25,129.35 78.25,130.45 78.9,131.1 84.157,131.1 85.647,132.59 85.647,134.747 86.5,135.6 90.593,135.6 92.793,137.8 100.5,137.8 102.8,135.5 105.081,135.5 106.781,133.8 115.5,133.8 116.7,135 116.7,136.8 117.6,137.7 126.4,137.7 129,135.1 130.4,135.1 134.3,131.2 136.107,131.2 137.2,130.107 137.2,128.9 138.9,127.2 138.9,80.7 137.27,79.07 120.27,79.07 114.6,73.4 112.038,73.4 C12.2@110.738,74.7 109.538,73.5 107.6,73.5 107,74.1 107,76.8 107.735,77.535 IC1.7@108.3,77.535
DMCS: R48.1 U4.58 | length 18.8
  Top Layer w0.3: U4.58@77.25,118.25 77.25,108.091 79.793,105.548 81.1,105.548 82.148,104.5 R48.1@84.438,104.5
DMDIN: R47.1 U4.57 | length 14.8
  Top Layer w0.3: U4.57@76.75,118.25 76.75,106.988 R47.1@79.238,104.5
DMOUT: U4.56 | length 14.4
  Top Layer w0.3: U4.56@76.25,118.25 76.25,106.4 77.4,105.25 77.4,104.8 77.7,104.5
DMSCLK: R46.1 U4.55 | length 13.9
  Top Layer w0.3: U4.55@75.75,118.25 75.75,105.15 76.162,104.738 R46.1@76.162,104.5
DSW41: R6.2 S1.5 | length 6.1
  Top Layer w0.3: R6.2@65.3,65.4 65.3,66.1 67.43,68.23 S1.5@69.845,68.23
GND: C2.1 C4.1 C5.1 C6.2 C7.2 C8.1 C9.1 C10.1 C11.1 C12.1 C14.2 C33.1 C34.2 C35.1 C38.2 C39.1 D1.C D2.C D11.C D12.C D15.C D17.C D18.2 D21.C DA1.1 IC1.5 IC2.2 IC3.2 J1.5 J1.SHIELD JP1.3 JP2.2 L2.2 Q1.2 Q1.4 Q2.2 Q3.2 Q4.2 Q5.2 Q7.2 R2.1 R8.1 R33.1 R40.1 R41.2 R42.2 S1.6 S1.7 S1.8 U2.2 U4.18 U4.31 U4.47 U4.63 U9.3 U10.3 U11.3 U12.3 U16.2 U17.2 U18.2 X3.1 X4.1 XP1.5 | length 704
  Top Layer w0.3: D21.C@61.1,85.1 62.7,85.1 DA1.1@63.6,84.2 ; v1(61.6,107.962) C33.1@61.6,110 ; v1(61.775,95.5) 61.775,94.15 C38.2@62.325,93.6 62.325,92.575 63.6,91.3 DA1.1@63.6,84.2 ; v1(62,66.1) 65.4,69.5 S1.6@69.81,69.5 ; J1.SHIELD@63.7,125.825 61.85,125.825 J1.SHIELD@61.4,126.275 ; R33.1@63.8,56.462 R40.1@62.1,56.462 60.4,58.162 60.4,75.004 61.596,76.2 61.596,76.7 60.7,77.596 60.7,81.1 61.6,82 C39.1@63.138,82 ; J1.5@64.06,122.062 64.06,121.26 J1.SHIELD@63.7,120.9 ; IC2.2@66.1,121.9 66.5,121.9 67,121.4 67,121.355 67.06,121.295 67.06,120.567 66.193,119.7 64.9,119.7 J1.SHIELD@63.7,120.9 ; C35.1@66.738,82 65.838,81.1 64.038,81.1 C39.1@63.138,82 ; C5.1@67.038,118.4 67.838,119.2 68.4,119.2 69.75,120.55 U4.47@70.95,120.55 72.114,120.55 74.2,122.636 v1(74.2,123.4) 74.2,123.881 76.5,126.181 v1(76.5,126.3) ; R2.1@67.062,115.9 v1(68.5,115.9) ; C8.1@68.762,60.538 68.435,60.865 U2.2@66.95,60.865 66.328,60.865 65,62.193 65,63.731 65.824,64.555 66.455,64.555 67.25,65.35 67.25,65.969 67.631,66.35 69.543,66.35 70.9,67.707 70.9,68.589 69.989,69.5 S1.6@69.845,69.5 S1.6@69.81,69.5 ; JP1.3@69.3,137.94 68.188,136.828 68.188,132 ; S1.8@69.845,72.04 69.81,72.005 S1.6@69.81,69.5 ; XP1.5@70.665,112.03 69.692,112.03 C10.1@68.6,110.938 69.938,109.6 72.1,109.6 72.5,109.2 72.5,108.7 X3.1@70.9,107.1 ; U4.31@73.25,129.35 73.25,130.343 72.993,130.6 70.853,130.6 70.153,131.3 69.595,131.3 69.147,131.748 68.393,131.748 68.188,131.953 68.188,132 ; U16.2@73.98,102.854 75.434,101.4 82.376,101.4 U18.2@83.83,102.854 85.184,101.5 86.911,101.5 87.47,102.059 87.47,105.123 87.093,105.5 83.986,105.5 80.7,108.786 JP2.2@80.7,109.2 ; v1(76.1,121.1) 77.857,121.1 79.75,119.207 U4.63@79.75,118.25 79.75,115.588 C9.1@80.9,114.438 C11.1@82.5,114.438 ; 78.88,101.425 U17.2@78.88,102.854 ; U4.18@79.75,129.35 79.75,126.95 v1(79.8,126.9) ; v1(81.9,129.9) 82.05,129.75 82.376,129.75 84.421,129.75 86.472,131.8 87.355,131.8 87.8,132.245 87.8,133.196 C2.1@86.834,134.162 ; C11.1@82.6,114.438 C11.1@82.5,114.438 ; IC3.2@84.76,58.54 82.62,56.4 76.7,56.4 73.3,59.8 71.605,59.8 71.1,60.305 Q7.2@71.1,62.8 71.1,64.762 R42.2@71.338,65 71.338,65.938 73.7,68.3 73.7,72.3 74.2,72.8 104.7,72.8 105.4,73.5 105.4,77.807 107.073,79.48 113.02,79.48 113.5,79 113.5,77.838 C14.2@112.4,76.738 112.4,74.838 C12.1@112.262,74.7 111.362,75.6 110,75.6 109.395,74.995 IC1.5@108.3,74.995 ; Q1.2@84.9,121.1 84.9,122.524 C7.2@85.076,122.7 86.176,123.8 87.074,123.8 88.2,122.674 88.2,119.2 ; Q1.4@87.2,119.3 88.1,119.3 88.2,119.2 ; L2.2@90.4,123.521 91.579,124.7 94.371,124.7 94.832,124.238 94.832,123.148 95.531,122.45 95.75,122.45 95.8,122.4 v1(95.8,119.2) ; v1(92.9,111.9) 92.827,111.973 D12.C@92.827,113.964 ; Q3.2@94.848,114.077 92.941,114.077 D12.C@92.827,113.964 ; U9.3@98.9,119.126 98.826,119.2 v1(95.8,119.2) ; Q2.2@107.15,114.077 107.037,113.964 D11.C@105.527,113.964 104.563,113 103,113 102.7,113.3 102.7,116.28 105.5,119.08 105.5,119.126 v1(109.5,119.126) U10.3@111.6,119.126 ; Q4.2@120.25,114.077 118.441,114.077 D15.C@118.327,113.964 117.463,113.1 116.2,113.1 115.7,113.6 115.7,116.393 118.507,119.2 v1(122,119.2) U11.3@124.226,119.2 ; 131,54 130.6,54.4 130.6,65.3 129.7,66.2 129.7,69.4 129.1,70 128.084,70 126.8,71.284 126.8,73 129.3,75.5 R41.2@133.038,75.5 ; Q5.2@132.648,114.077 132.535,113.964 D17.C@130.565,113.964 129.701,113.1 128.464,113.1 127.9,113.664 127.9,116.593 130.407,119.1 v1(134.2,119.1) 136.67,119.1 U12.3@136.7,119.13 ; J1.SHIELD@61.4,126.275 J1.SHIELD@61.4,124.2 J1.SHIELD@61.4,122.525 J1.SHIELD@61.4,120.45 61.85,120.9 J1.SHIELD@63.7,120.9 ; J1.SHIELD@61.4,126.275 60.993,126.682 D2.C@60.993,128.9 60.987,128.906 D1.C@60.987,130.6 60.987,130.687 61.9,131.6 66.413,131.6 C4.1@67.413,130.6 67.413,131.225 68.188,132 ; C39.1@63.138,82 63.138,82.7 63.6,83.162 DA1.1@63.6,84.2 ; C11.1@82.5,114.438 84.562,116.5 85.762,116.5 C6.2@86.762,117.5 87.279,117.5 88.2,118.421 88.2,119.2 ; D12.C@92.827,113.964 92.063,113.2 90.5,113.2 90.4,113.3 90.4,116.9 90.7,117.2 92,117.2 93.25,118.45 93.25,118.769 93.681,119.2 v1(95.8,119.2)
  Top Layer w3: X4.1@128.1,54 131,54 D18.2@133.2,54
  Bottom Layer w0.3: v1(68.5,115.9) 68.5,109.5 X3.1@70.9,107.1 ; JP1.3@69.3,137.94 68.188,136.828 68.188,131.488 62,125.3 62,113.7 61.5,113.2 61.6,113.1 v1(61.6,107.962) 61.6,104.9 62.7,103.8 v1(62.7,97.4) 61.8,96.5 61.775,96.5 v1(61.775,95.5) 61.775,67.675 61.1,67 v1(62,66.1) 62,48.95 62.9,48.05 70.55,48.05 71.6,47 94,47 95.1,48.1 95.1,57.8 90.26,62.64 88.86,62.64 ; v1(74.2,123.4) 76.1,121.5 v1(76.1,121.1) 77.5,119.7 81.6,119.7 84.4,116.9 84.4,111.9 ; 76.478,83.522 73.4,86.6 73.4,95.6 67.8,101.2 67.8,105.3 69.6,107.1 X3.1@70.9,107.1 ; v1(76.5,126.3) 77.05,126.85 79.75,126.85 v1(79.8,126.9) 79.8,127.819 79.819,127.819 v1(81.9,129.9) ; v1(92.9,111.9) 84.4,111.9 ; v1(95.8,119.2) 95.9,119.1 v1(134.2,119.1) ; X3.1@70.9,107.1 78.6,107.1 JP2.2@80.7,109.2 83.4,111.9 84.4,111.9
  Bottom Layer w3: IC3.2@84.76,58.54 88.86,62.64
  other v1: 139,56.5 138.7,68.4 67.4,70.6 62.6,73.8 137.8,87 62.7,90.5 93,90.5 119.9,90.8 107.1,91.1 64.9,95.3 61.8,97.9 105.6,111.6 118,111.7 131.6,111.7 97.8,112.1 83.5,113 69.6,115.6 94.7,119.4 108,119.9 74.7,121.1 73.1,124 78.2,126
GND_BALANCER: D13.2 R33.2 U13.2 X7.1 | length 20.5
  Top Layer w0.3: R33.2@63.8,54.938 65.562,54.938 65.6,54.9 ; D13.2@65.6,55.8 65.6,54.9 ; U13.2@70.3,52.17 67.865,49.735 ; X7.1@75.3,49.041 74.659,48.4 69.2,48.4 67.865,49.735 ; 65.6,54.9 65.6,52 67.865,49.735